# Altium PCB PCB1.PcbDoc
Units mm, origin at the board's own origin, x right, y up, seen from the top; angles counter-clockwise.
Board outline 81.92 x 91.69 mm, 2 copper layers (Top Layer, Bottom Layer); 42 components, 45 nets, 160 pads, 39 vias.
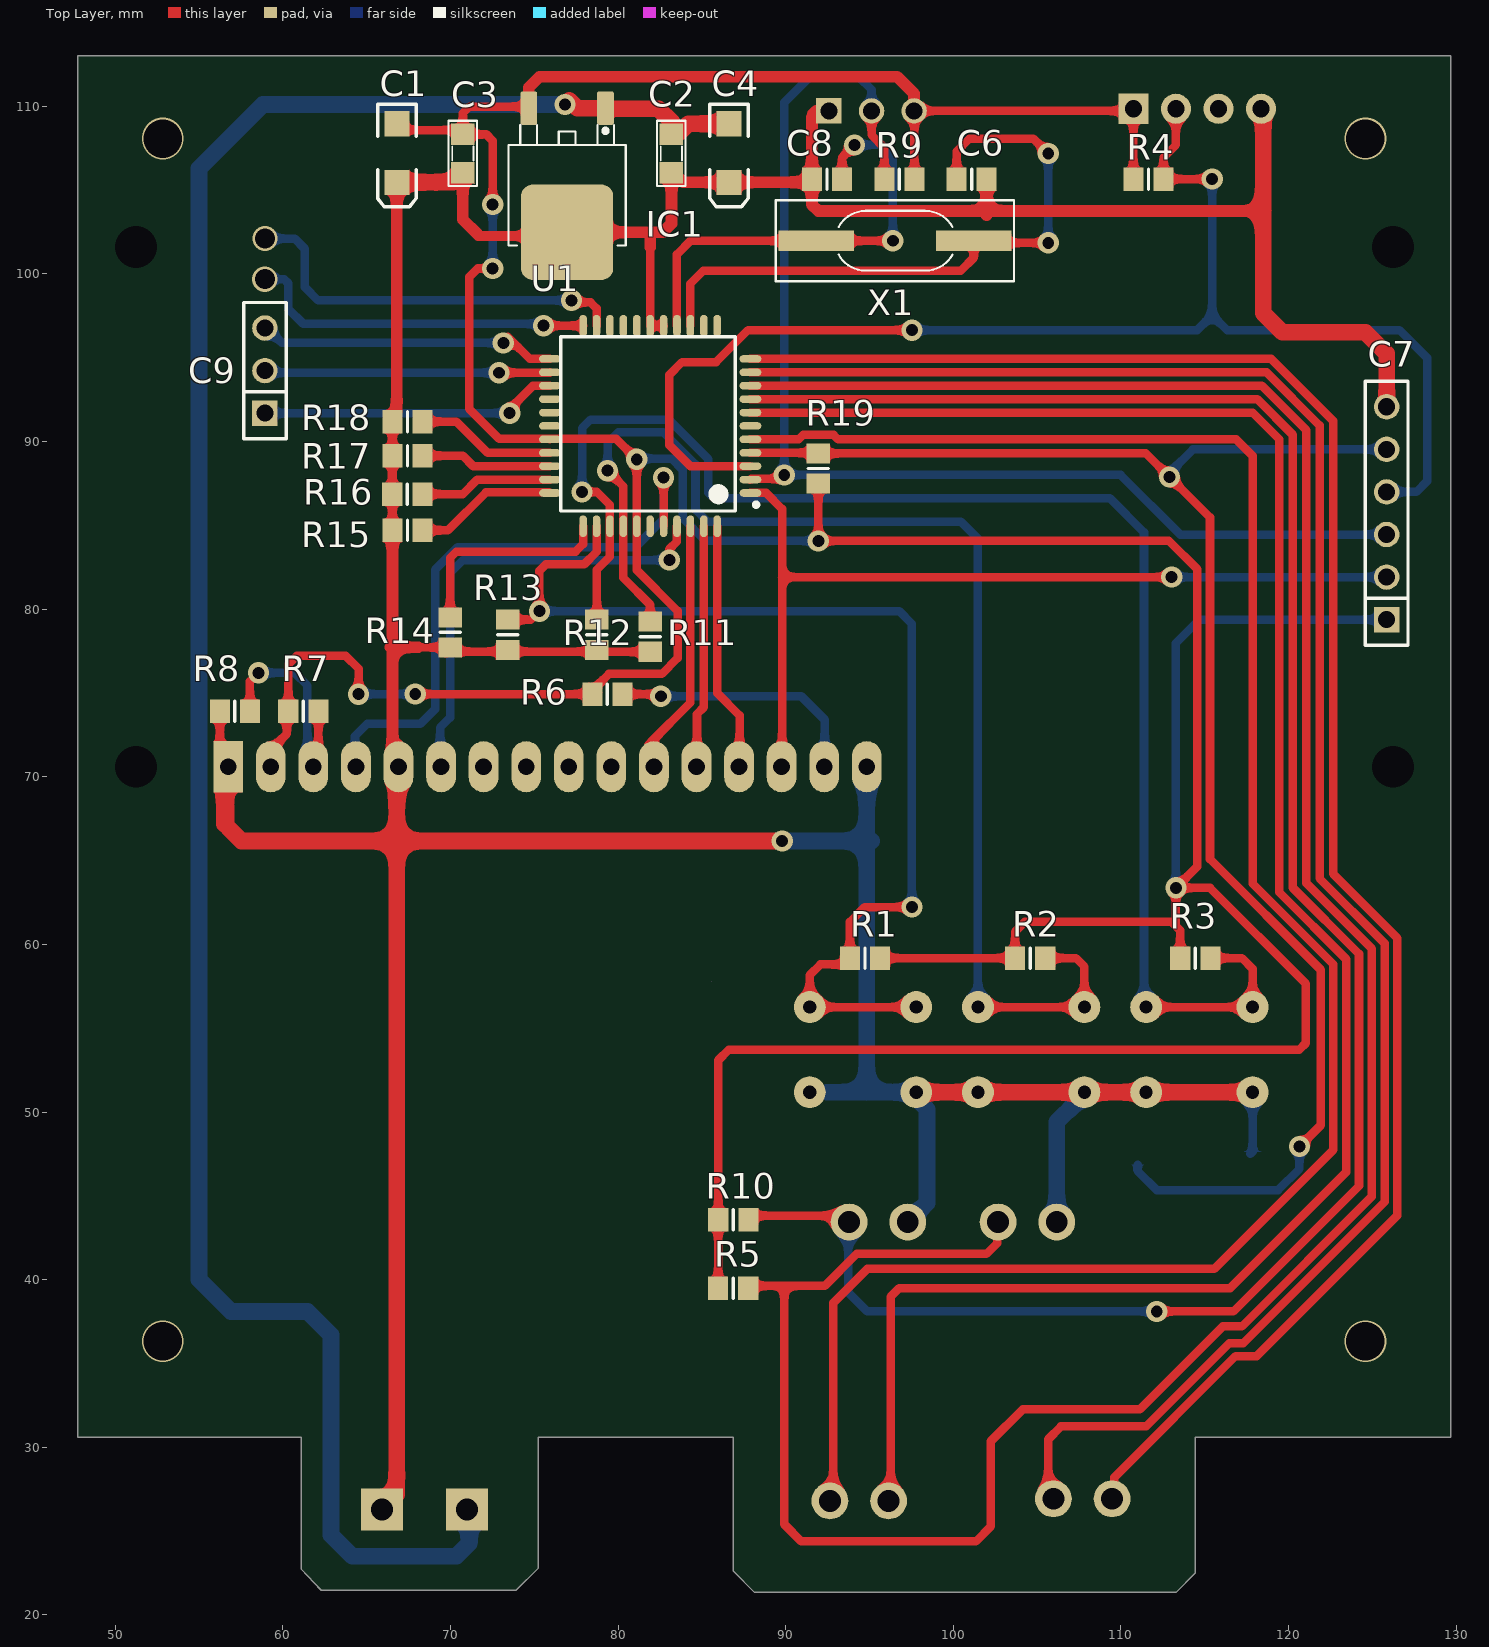
[diagram p0: Top Layer view]
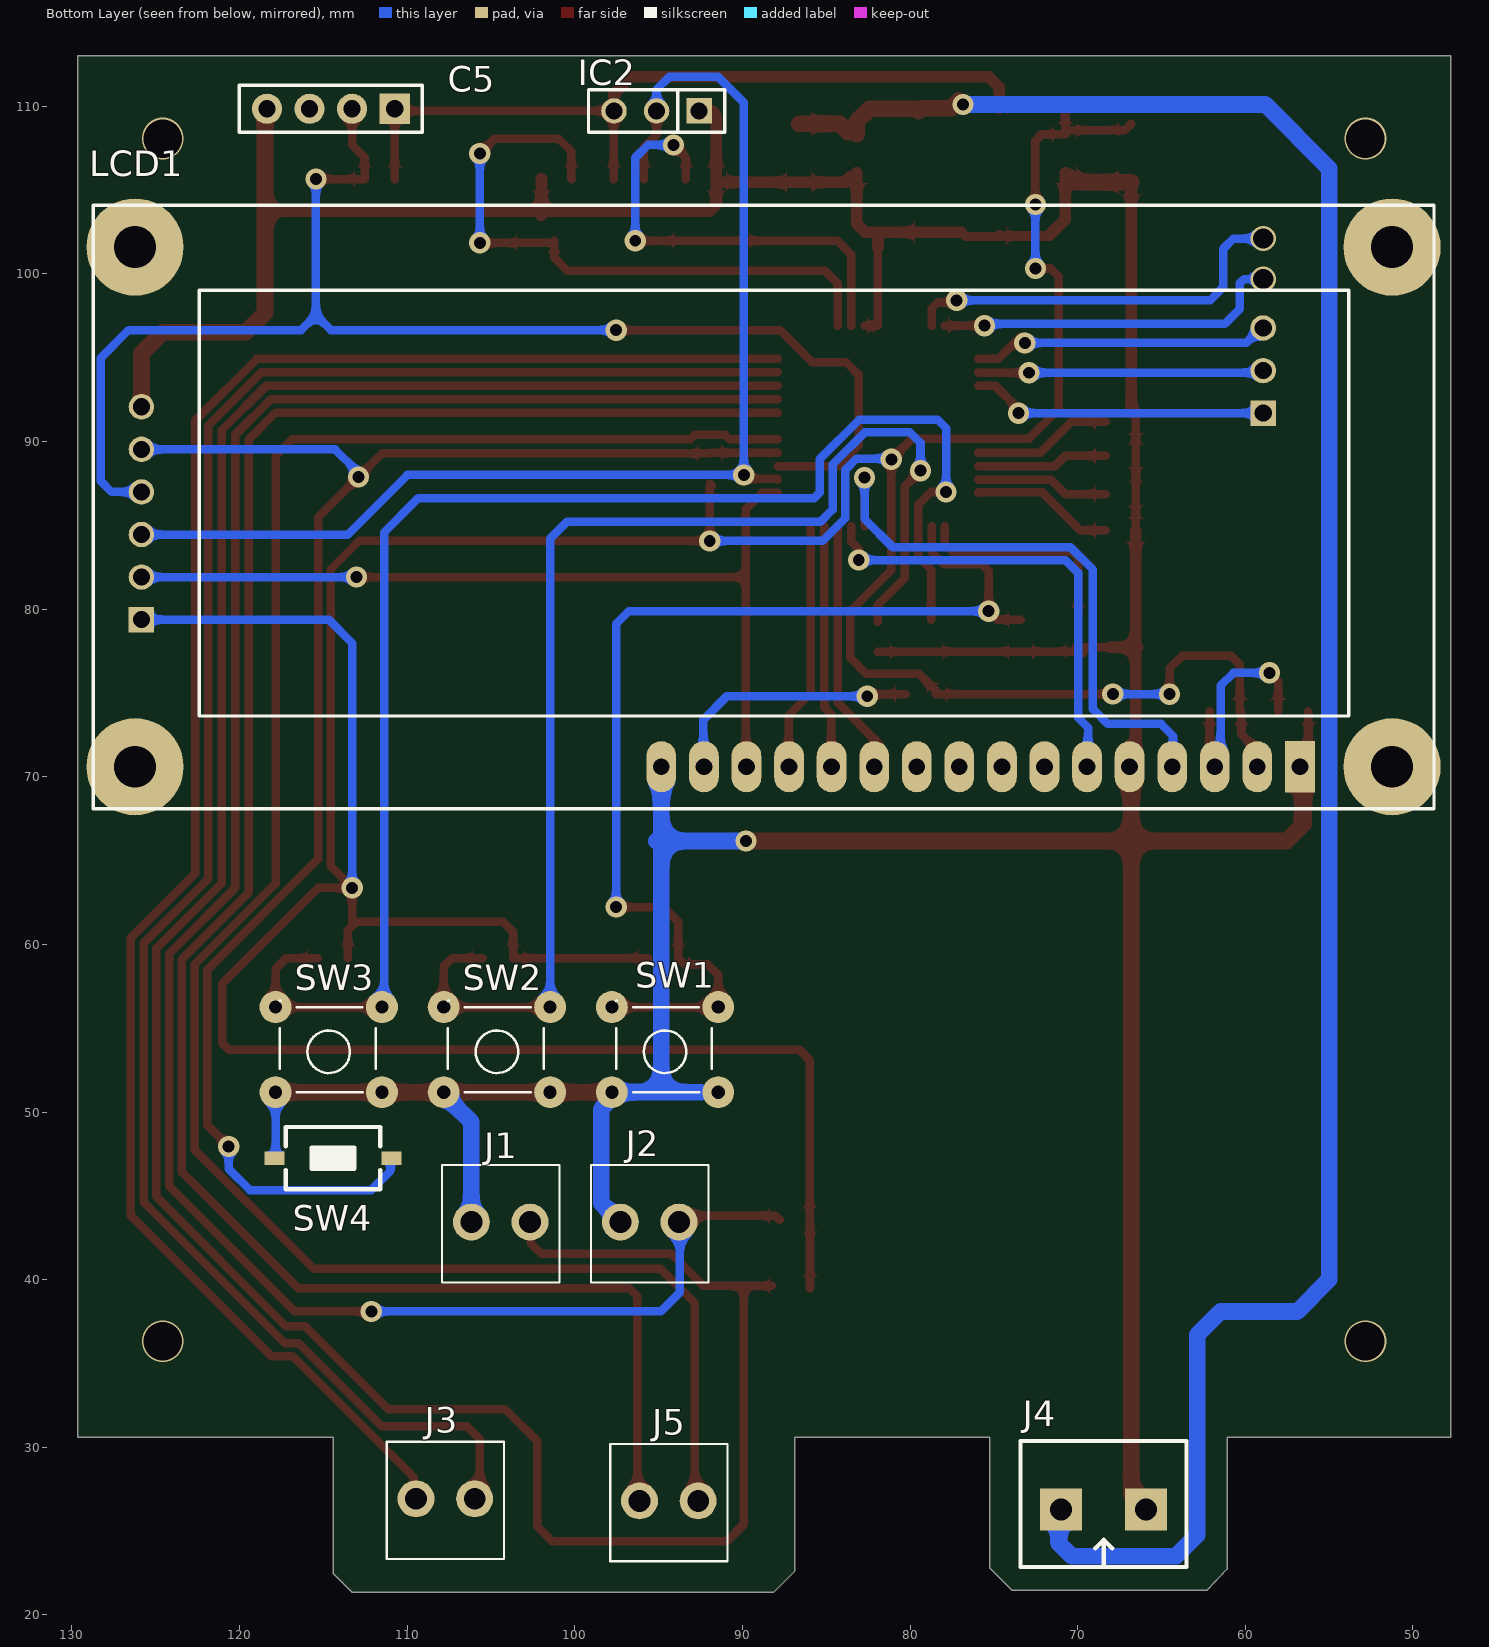
[diagram p1: Bottom Layer view, seen from below]
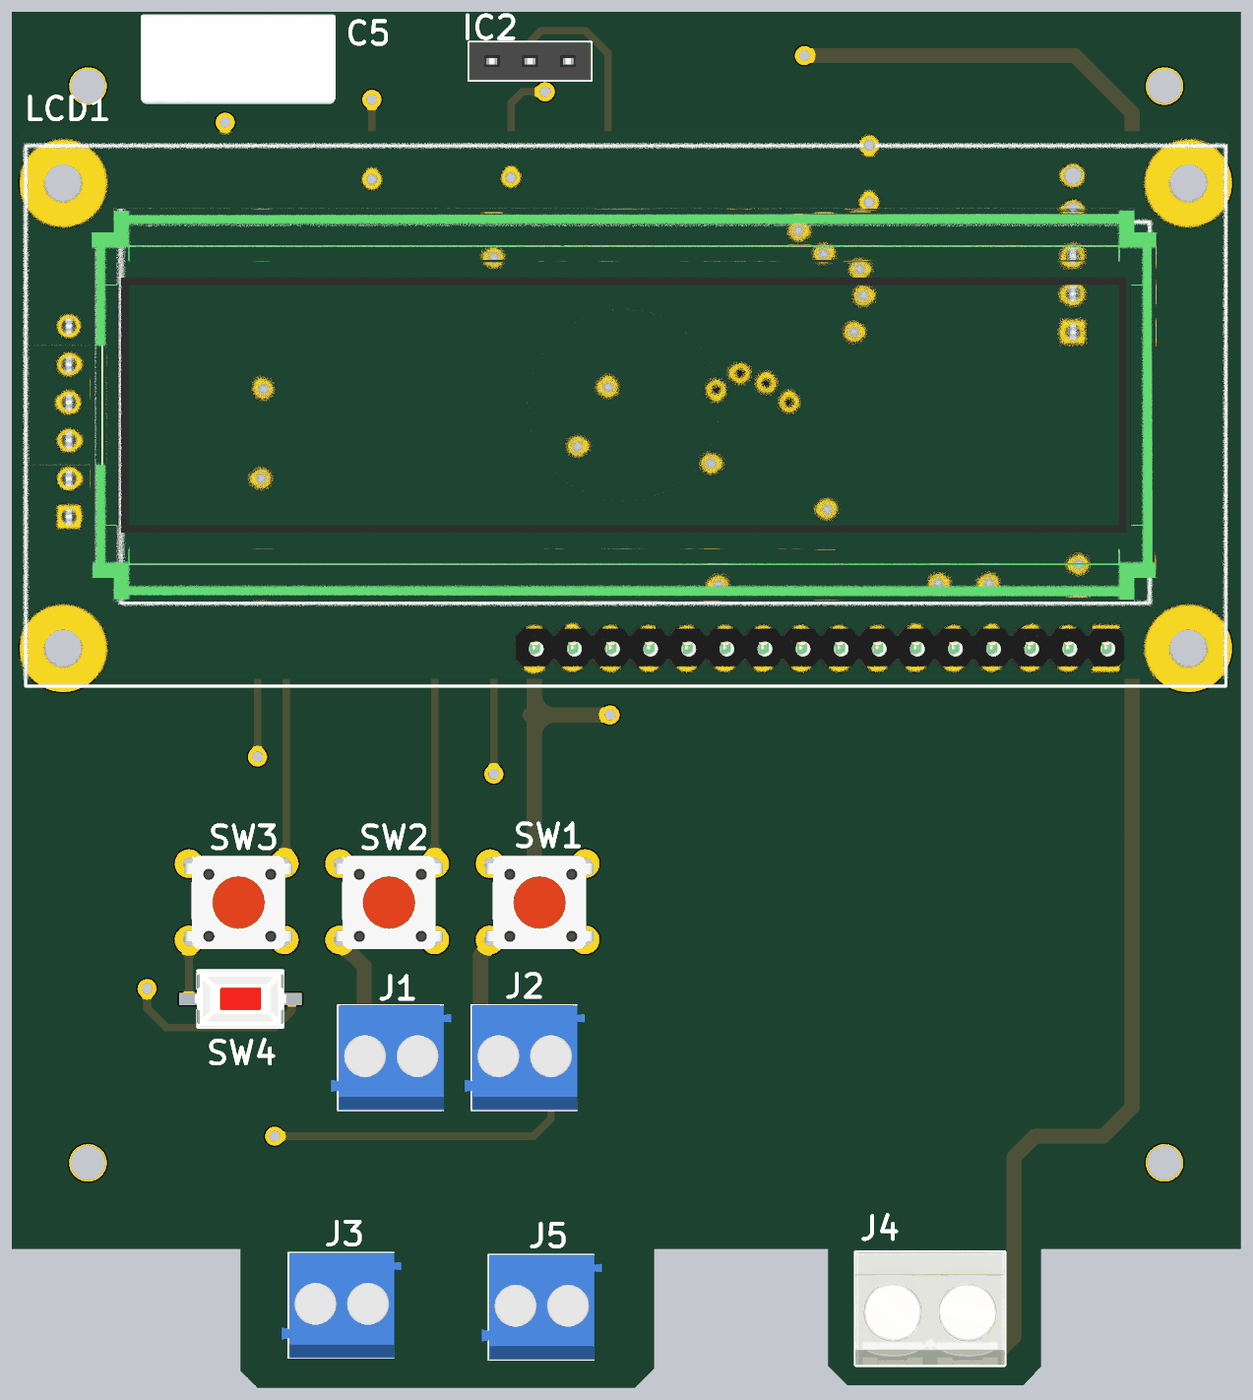
[diagram p2: 3D render of the assembled board from below, using the file's embedded part models]

## Layer stack, top to bottom
Top Solder: solder mask 0.0102, Solder Resist, Dk 3.5
Top Layer: signal copper 0.0356
Dielectric 1: dielectric 0.32, FR-4, Dk 4.8
Bottom Layer: signal copper 0.0356
Bottom Solder: solder mask 0.0102, Solder Resist, Dk 3.5

## Board outline
61.087,22.726 62.287,21.463 73.914,21.463 75.248,22.796 75.248,30.607 86.868,30.607 86.868,22.606 88.138,21.336 113.284,21.336 114.427,22.479 114.427,30.607 129.667,30.607 129.667,113.03 47.752,113.03 47.752,101.727 47.752,30.607 61.087,30.607
cut-out: 85.598,57.785

## Design rules (kind name [scope] priority, off if disabled: settings)
Clearance [All] p1: gap=0.254 ignorepadtopadclearanceinfootprint=FALSE
PlaneConnect [All] p1: planeconnectstyle=Direct reliefexpansion=0.508 reliefentries=4 reliefconductorwidth=0.254 reliefairgap=0.254
PolygonConnect [All] p1: connectstyle=Relief reliefconductorwidth=0.5 reliefentries=4 polygonreliefangle="90 Angle" airgapwidth=0.5
RoutingVias [All] p1: holewidth=0.711 width=1.27 viastyle="Through Hole" minholewidth=0.711 minwidth=1.27 maxholewidth=0.711 maxwidth=1.27
SolderMaskExpansion [All] p1: expansion=0.102
UnRoutedNet [All] p1: checkbadconnections=TRUE
Width [All] p1: maxlimit=2 minlimit=0.508 preferedwidth=0.508
28 further rules are at their usual default settings.

## Classes and differential pairs
component class sheet_LAC: C1 C2 C3 C4 C5 C6 C7 C8 C9 IC1 IC2 J4 J5 LCD1 R1 R2 R3 R4 R5 R6 R7 R8 R9 R10 R11 R12 R13 R14 R15 R16 R17 R18 R19 SW1 SW2 SW3 SW4 X1

## Components (designator, comment, footprint, x,y, rotation, side; value= is the part's Value field where it differs from the comment)
C1 "CN-ALU-SMD" 3.2X1.6X1.1 66.802,107.216 r270 top
C2 "104" SM-CAP-0805 83.185,108.331 r270 top value=0,1uF/300V
C3 "104" SM-CAP-0805 70.739,108.331 r270 top value=0,1uF/300V
C4 "CN-ALU-SMD" 3.2X1.6X1.1 86.614,107.216 r270 top
C5 "DHT11" DHT11 114.554,109.855 r0 bottom
C6 "33pF" 6-0805_N 101.092,105.664 r180 top value=100pF
C7 "JP6" JP6-C1T 125.857,79.375 r90 top
C8 "33pF" 6-0805_N 92.467,105.664 r0 top value=100pF
C9 "JP3" JP3-C1T 58.928,91.694 r90 top
IC1 "LM78xx" TO252-123 76.962,106.189 r180 top
IC2 "DS18S20" JP3-C1T 92.583,109.728 r0 bottom
J1 "KF2" KF2-3.5 104.422,43.434 r180 bottom
J2 "KF2" KF2-3.5 95.532,43.434 r180 bottom
J3 "KF2" KF2-3.5 107.724,26.924 r180 bottom
J4 "KF2" KF2-5.08 68.453,26.289 r0 bottom
J5 "KF2" KF2-3.5 94.389,26.797 r180 bottom
LCD1 "LCD16x2A" LCD16X2 56.738,70.6 r0 bottom locked
R1 "10k" 6-0805_N 94.731,59.182 r180 top value="R1/4W - 1K"
R2 "10k" 6-0805_N 104.584,59.182 r0 top value="R1/4W - 1K"
R3 "10k" 6-0805_N 114.438,59.182 r0 top value="R1/4W - 1K"
R4 "1k" 6-0805_N 111.644,105.664 r0 top value="R1/4W - 1K"
R5 "10k" 6-0805_N 86.868,39.497 r0 top value="R1/4W - 1K"
R6 "1k" 6-0805_N 79.364,74.93 r0 top value="R1/4W - 1K"
R7 "10k" 6-0805_N 61.225,73.914 r0 top value="R1/4W - 1K"
R8 "10k" 6-0805_N 57.139,73.914 r180 top value="R1/4W - 1K"
R9 "1k" 6-0805_N 96.785,105.664 r0 top value="R1/4W - 1K"
R10 "10k" 6-0805_N 86.879,43.561 r0 top value="R1/4W - 1K"
R11 "1k" 6-0805_N 81.915,78.359 r270 top value="R1/4W - 1K"
R12 "1k" 6-0805_N 78.74,78.475 r270 top value="R1/4W - 1K"
R13 "1k" 6-0805_N 73.406,78.475 r270 top value="R1/4W - 1K"
R14 "1k" 6-0805_N 69.977,78.613 r270 top value="R1/4W - 1K"
R15 "1k" 6-0805_N 67.437,84.709 r180 top value="R1/4W - 1K"
R16 "1k" 6-0805_N 67.426,86.868 r180 top value="R1/4W - 1K"
R17 "1k" 6-0805_N 67.437,89.154 r180 top value="R1/4W - 1K"
R18 "1k" 6-0805_N 67.437,91.186 r180 top value="R1/4W - 1K"
R19 "1k" 6-0805_N 91.948,88.392 r270 top value="R1/4W - 1K"
SW1 "SW" SW2-DIP 91.44,51.181 r0 bottom locked value="Button chip 4 pin"
SW2 "SW" SW2-DIP 101.473,51.181 r0 bottom locked value="Button chip 4 pin"
SW3 "SW" SW2-DIP 111.506,51.181 r0 bottom locked value="Button chip 4 pin"
SW4 "SW" SW1-SMD 114.427,47.244 r180 bottom value="SW chip 2 pin"
U1 "AT89S52-24AU" TQFP44 81.915,90.932 r180 top locked
X1 "12Mhz" XT2-SMD 96.393,101.981 r180 top value=4Mhz

## Footprints (in the part's own frame and the unit in brackets; to place one, negate y for a bottom-side part, rotate by r counter-clockwise, add the part's x,y. Pads: shape width x height; smd on the part's side, far side on the other; paste and mask are expansions set on the pad)
3.2X1.6X1.1 [mm] "SMT LED; 2 Flat Leads"
  rect 1.5x1.5 smd: 1(-1.75,0) 2(1.75,0)
  silkscreen extent -2.9,-1.15 3.2,1.15
6-0805_N [mm] "Chip Resistor, Body 2.0x1.2mm, IPC Medium Density"
  rect 1.2x1.4 smd: 1(-0.9,0) 2(0.9,0)
  silkscreen extent 0,-0.6 0,0.6, body extent -1.07,-0.7 1.07,0.7, height 0.7
DHT11 [mm]
  rect 1.8x1.8 hole 1.02: 1(-3.81,0)
  round 1.8 hole 1.02: 2(-1.27,0) 3(1.27,0) 4(3.81,0)
  silkscreen extent -5.46,-1.4 5.46,1.4, body extent -6.48,-3 6.52,3, height 26
JP3-C1T [mm] "3 row, straight, gold plating"
  rect 1.52x1.52 hole 1.02: 1(0,0)
  round 1.52 hole 1.02: 2(2.54,0) 3(5.08,0)
  silkscreen extent -1.52,-1.27 6.6,1.27, body extent -1.52,-1.25 6.6,1.25, height 8.51
JP6-C1T [mm] "6 row, straight, gold plating"
  rect 1.52x1.52 hole 1.02: 1(0,0)
  round 1.52 hole 1.02: 2(2.54,0) 3(5.08,0) 4(7.62,0) 5(10.16,0) 6(12.7,0)
  silkscreen extent -1.52,-1.27 14.22,1.27, body extent -1.52,-1.25 14.22,1.25, height 8.51
KF2-3.5 [mm] "3,50mm - modular - blue - Horizontal wire entry - Pressure clamp - 8,4mm height - 02p"
  round 2.2 hole 1.3: 1(-1.75,0) 2(1.75,0)
  silkscreen extent -3.5,-3.6 3.5,3.4, body extent -3.95,-3.6 4.05,3.4, height 8.41
KF2-5.08 [mm]
  rect 2.5x2.5 hole 1.3: 1(-2.54,0) 2(2.54,0)
  silkscreen extent -4.95,-4.08 4.95,3.43, body extent -5,-4.07 5,3.43, height 10
LCD16X2 [mil] "LCD dipslay 16x2, 16 pin"
  rect 70x120 hole 39.37: 1(0,0)
  oval 70x120 hole 39.37: 2(100,0.02) 3(200,0) 4(300,0) 5(400,0) 6(500,0) 7(600,0) 8(700,0) 9(800,0) 10(900,0) 11(1000,0) 12(1100,0) 13(1200,0) 14(1300,0) 15(1400,0) 16(1500,0)
  round 228.35 / inner round 0 / far side round 0 hole 98.43 unplated: M1(-216.54,0) M2(2736.22,0) M3(-216.54,-1220.47) M4(2736.22,-1220.47)
  silkscreen extent -315,-1319 2835,98, body extent -320,-1357 2849,80, height 714
SM-CAP-0805 [mil]
  rect 50x55 smd: 1(0,0) 2(90,0)
  silkscreen extent -32,-34 121,33, body extent 6,-25 84,25, height 31
SW1-SMD [mm]
  rect 1.2x0.8 smd: 1(-3.5,0) 2(3.5,0)
  silkscreen extent -2.82,-1.85 2.82,1.85, body extent -3.05,-1.85 3.05,1.85, height 2.5
SW2-DIP [mil] "SW button 4pin, 250 x250 mil"
  round 75 hole 31: 1(0,0) 2(0,-200) 3(250,-200) 4(250,0)
  silkscreen extent 15,-215 240,0, body extent -36,-220 276,24, height 276
TO252-123 [mm]
  round 0.5 on Mech15: 0(0,0)
  rrect25% 1x2 smd: 1(-2.285,-3.7) 3(2.285,-3.7)
  rrect25% 5.5x5.7 smd: 2(0,3.7)
  silkscreen extent -3.5,-2.7 3.5,4.5, body extent -3.3,-3.95 3.3,5.76, height 2.31
TQFP44 [mm] "TQFP, 44-Leads, Body 10X10mm, Pitch 0.80mm, IPC High Density"
  oval 1.3x0.45 smd: 1(-5.981,4) 2(-5.981,3.2) 3(-5.981,2.4) 4(-5.981,1.6) 5(-5.981,0.8) 6(-5.981,0) 7(-5.981,-0.8) 8(-5.981,-1.6) 9(-5.981,-2.4) 10(-5.981,-3.2) 11(-5.981,-4) 23(5.981,-4) 24(5.981,-3.2) 25(5.981,-2.4) 26(5.981,-1.6) 27(5.981,-0.8) 28(5.981,0) 29(5.981,0.8) 30(5.981,1.6) 31(5.981,2.4) 32(5.981,3.2) 33(5.981,4)
  oval 0.45x1.3 smd: 12(-4,-5.981) 13(-3.2,-5.981) 14(-2.4,-5.981) 15(-1.6,-5.981) 16(-0.8,-5.981) 17(0,-5.981) 18(0.8,-5.981) 19(1.6,-5.981) 20(2.4,-5.981) 21(3.2,-5.981) 22(4,-5.981) 34(4,5.981) 35(3.2,5.981) 36(2.4,5.981) 37(1.6,5.981) 38(0.8,5.981) 39(0,5.981) 40(-0.8,5.981) 41(-1.6,5.981) 42(-2.4,5.981) 43(-3.2,5.981) 44(-4,5.981)
  silkscreen extent -6.45,-5.33 5.33,5.07, body extent -5.99,-5.96 6.01,6.04, height 1.05
XT2-SMD [mm]
  rect 4.5x1.2 smd: 1(-4.826,0) 2(4.572,0)
  silkscreen extent -7.24,-2.41 6.99,2.41, body extent -6.53,-2.41 6.27,2.42, height 4.3

## Part data
C1 C4: "Polarized Capacitor (Axial)", LatestRevisionDate=17-Jul-2002, LatestRevisionNote="Re-released for DXP Platform.", PackageReference=POLAR0.8, Published=8-Jun-2000, Publisher="Altium Limited"
C2 C3: library part CN, Designed by=VanDungEvn
C5: Manufacturer="Würth Elektronik eiSos GmbH", partNo=613004143121, ComponentLink1 Description=Manufacturer, ComponentLink1URL=http://www.we-online.com, ComponentLink2 Description=Datasheet, ComponentLink2URL=http://katalog.we-online.de/em/datasheet/6130xx143121.pdf, Created by="Karrer Zheng", Created Date="29 March 2013", NoPins=04
C6 C8: library part CN1, "Cap np  1pF - 472pF"
C7: "WR-PHD 2.54 mm Angled Socket Header", Manufacturer="Würth Elektronik eiSos GmbH", partNo=613006143121, ComponentLink1 Description=Manufacturer, ComponentLink1URL=http://www.we-online.com, ComponentLink2 Description=Datasheet, ComponentLink2URL=http://katalog.we-online.de/em/datasheet/6130xx143121.pdf, Created by="Karrer Zheng", Created Date="29 March 2013", NoPins=06
C9: "WR-PHD 2.54 mm Angled Socket Header", Manufacturer="Würth Elektronik eiSos GmbH", partNo=613003143121, ComponentLink1 Description=Manufacturer, ComponentLink1URL=http://www.we-online.com, ComponentLink2 Description=Datasheet, ComponentLink2URL=http://katalog.we-online.de/em/datasheet/6130xx143121.pdf, Created by="Karrer Zheng", Created Date="29 March 2013", NoPins=03
IC1: "Positive Voltage Regulator", ComponentLink1Description="Manufacturer Link", ComponentLink1URL=http://www.st.com/, ComponentLink2Description=Datasheet, ComponentLink2URL=http://www.st.com/stonline/products/literature/ds/2146/l78m05c.pdf, DatasheetVersion=Apr-1994, LatestRevisionDate=17-Jul-2002, LatestRevisionNote="Re-released for DXP Platform.", Note="Tab is connected to pin 3 (GND).", PackageDescription="TO, Thru-Hole, Vertical, Heatsink Mounted; 3 In-Line Leads; Pitch 2.54 mm; Pin sequence 1, 3, 2", PackageReference=ISOWATT220AB, PackageVersion=Jul-1998, Published=24-Aug-2001, Publisher="Altium Limited"
IC2: "High Precision  1-Wire® Digital Thermometer"
J1 J2 J3 J4 J5: Manufacturer="Würth Elektronik eiSos GmbH", partNo=691103110002, ComponentLink1 Description=Manufacturer, ComponentLink1URL=http://www.we-online.com, ComponentLink2 Description=Datasheet, ComponentLink2URL=http://katalog.we-online.de/em/datasheet/6911031100xx.pdf, Created by="Karrer Zheng", Created Date="29 October 2013", NoPins=2
LCD1: library part LCD16x2, "LCD dipslay 16 char, 2 line"
R1 R2 R3 R4 R5 R6 R7 R8 R9 R10 R11 R12 R13 R14 R15 R16 R17 R18 R19: library part R1/4W, "Resistor 1/4W"
SW1 SW2 SW3: library part SW4, "Switch button 4 pin"
SW4: library part SW2, "Switch button 2 pin"
U1: "Atmel 8 Bit Micro 4.0-5.5V 24MHz -40 to +80 Deg C 44TQFP (44A) Package GREEN OPTION", Package="44A 44-lead, Thin Plastic Gull Wing Quad Flatpack (TQFP)", GREEN OPTION=YES, PartNr=AT89S52-24AU, Vendor=ATMEL
X1: library part XT2, "Crystal, 32.768 KHz, -40 to 85 degC, 3.2 x 1.5 x 0.9 mm SMD"

## Via types
v1: diameter 1.27, hole 0.711, Top Layer to Bottom Layer, 33 vias
v2: diameter 2.5, hole 2.3, Top Layer to Bottom Layer, 4 vias
v3: diameter 1.52, hole 1.2, Top Layer to Bottom Layer, 1 vias
v4: diameter 1.5, hole 1.2, Top Layer to Bottom Layer, 1 vias

## Nets (pads, with @x,y where several pads share a name; then routed paths per layer and width w, separated by ;. In a path a pad name is that pad's centre, name@x,y a point inside that pad or via, vN(x,y) a via of type N, cw(c..) or ccw(c..) an arc to the next point about the centre after c; other vN are vias at no path point)
06: U1.6
12: U1.12
13: U1.13
18: U1.18
19: U1.19
20: U1.20
21: U1.21 | length 23.3
  Top Layer w0.508: v1@77.724,98.298 78.359,98.298 78.715,97.942 U1.21
  Bottom Layer w0.508: v4(58.928,102.108) 60.706,102.108 61.309,101.505 61.309,99.219 62.103,98.425 v1(77.216,98.425)
22: U1.22 | length 20.6
  Top Layer w0.508: v1(75.553,96.913) U1.22
  Bottom Layer w0.508: v3@59.563,99.822 59.69,99.695 60.071,99.695 60.325,99.441 60.325,97.917 61.214,97.028 75.438,97.028 v1(75.553,96.913)
  Bottom Layer w0.51: v3@59.436,99.568 v3@59.563,99.568
  other v3: 58.928,99.695
23: C9.3 U1.23 | length 17.9
  Top Layer w0.508: v1(73.152,95.885) 73.152,96.012 73.406,96.266 74.74,94.932 U1.23
  Bottom Layer w0.508: C9.3@59.182,96.647 59.944,95.885 v1(73.152,95.885)
24: C9.2 U1.24 | length 17.1
  Top Layer w0.508: v1(72.898,94.107) 75.909,94.107 U1.24
  Bottom Layer w0.508: C9.2 59.055,94.107 v1(72.898,94.107)
25: C9.1 U1.25 | length 17.8
  Top Layer w0.508: v1(73.533,91.694) 73.533,91.948 74.917,93.332 U1.25
  Bottom Layer w0.508: C9.1 v1(73.533,91.694)
26: U1.26
27: U1.27
28: U1.28
29: U1.39
30: R18.1 U1.30 | length 8.4
  Top Layer w0.508: R18.1 70.358,91.186 72.212,89.332 U1.30
31: R17.1 U1.31 | length 7.9
  Top Layer w0.508: R17.1 70.739,89.154 71.361,88.532 U1.31
32: R16.1 U1.32 | length 8
  Top Layer w0.508: R16.1 70.739,86.868 71.603,87.732 U1.32
33: R15.1 U1.33 | length 8.5
  Top Layer w0.508: R15.1 69.85,84.709 72.111,86.97 75.896,86.97 U1.33
34: R14.1 U1.34 | length 12.9
  Top Layer w0.508: R14.1 69.977,83.058 70.358,83.439 77.47,83.439 77.915,83.884 U1.34
+12: C2.1 C4.1 IC1.1 J4.2 | length 134.4
  Top Layer w0.508: IC1.1 82.423,109.889
  Top Layer w1: v1@77.089,110.363 77.563,109.889 IC1.1 ; IC1.1@79.502,109.728 79.629,109.855 82.423,109.855 83.185,109.093 C2.1 ; C2.1@83.693,108.458 84.201,108.966 C4.1
  Bottom Layer w1: J4.2@71.12,25.146 71.12,24.257 70.358,23.495 64.135,23.495 62.865,24.765 62.865,36.703 61.468,38.1 56.896,38.1 54.991,40.005 54.991,106.299 58.801,110.109 v1(76.835,110.109)
channel: R1.2 R13.1 SW1.2 SW1.3 U1.35 | length 66
  Top Layer w0.508: R13.1 74.803,79.375 v1(75.311,79.883) 75.311,82.296 75.692,82.677 77.978,82.677 78.715,83.414 U1.35 ; SW1.3@97.155,56.261 SW1.2 91.44,58.166 92.075,58.801 93.45,58.801 R1.2 93.831,61.341 94.72,62.23 v1(97.536,62.23)
  Bottom Layer w0.508: v1(75.311,79.883) 96.774,79.883 97.536,79.121 v1(97.536,62.23)
Control_H: J5.1 U1.7 | length 119.1
  Top Layer w0.508: U1.7 117.856,91.732 119.456,90.132 119.456,63.105 123.444,59.117 123.444,46.42 116.521,39.497 96.774,39.497 96.266,38.989 J5.1@96.266,27.686
Control_T: J5.2 U1.5 | length 118.6
  Top Layer w0.508: U1.5 90.77,90.132 91.038,90.4 92.858,90.4 93.126,90.132 116.878,90.132 117.856,89.154 117.856,63.627 122.682,58.801 122.682,47.752 115.57,40.64 94.869,40.64 92.837,38.608 92.837,27.813 J5.2@92.964,27.686
DATA_RH: C5.2 C7.4 R4.2 U1.3 | length 81.8
  Top Layer w0.508: U1.3 84.315,88.532 83.058,89.789 83.058,93.98 83.82,94.742 85.852,94.742 87.757,96.647 v1@96.901,96.647 ; C5.2 113.284,107.696 112.544,106.956 R4.2 v1(115.443,105.664)
  Bottom Layer w0.508: v1@97.917,96.647 114.554,96.647 115.443,97.536 ; v1(115.443,105.664) 115.443,97.536 ; C7.4 127.635,86.995 128.27,87.63 128.27,94.996 126.619,96.647 116.332,96.647 115.443,97.536
  other v1: 97.536,96.647
DQ: C7.3 IC2.2 R9.1 U1.2 | length 73.4
  Top Layer w0.508: U1.2 87.934,87.77 89.802,87.77 89.916,87.884 v1(89.916,88.011) ; IC2.2@95.123,109.474 95.123,108.296 95.885,107.534 R9.1
  Bottom Layer w0.508: IC2.2 95.123,110.998 94.361,111.76 91.44,111.76 89.916,110.236 v1(89.916,88.011) 109.982,88.011 113.538,84.455 C7.3
Engine1: J3.1 U1.11 | length 109.4
  Top Layer w0.508: U1.11 118.967,94.932 122.656,91.243 122.656,64.215 126.492,60.379 126.492,43.815 118.11,35.433 116.84,35.433 109.601,28.194 J3.1@109.601,27.432
Engine2: J3.2 U1.10 | length 111.7
  Top Layer w0.508: U1.10 118.689,94.132 121.856,90.965 121.856,63.938 125.73,60.064 125.73,44.639 117.286,36.195 116.459,36.195 111.506,31.242 106.426,31.242 105.664,30.48 J3.2@105.664,27.94
Giam: R3.2 R12.1 SW3.2 SW3.3 U1.36 | length 90.4
  Top Layer w0.508: v1(77.851,86.995) 78.74,86.995 79.515,86.22 U1.36 79.515,83.136 78.74,82.361 R12.1 ; SW3.2 SW3.3 117.856,58.547 117.221,59.182 R3.2
  Bottom Layer w0.508: v1(77.851,86.995) 77.851,90.805 78.359,91.313 83.02,91.313 85.382,88.951 85.382,86.957 85.725,86.614 109.347,86.614 111.379,84.582 111.379,56.388 SW3.2
GND: C1.2 C2.2 C3.2 C4.2 C5.4 C6.1 C7.6 C8.1 IC1.2 IC2.1 J1.1 J2.1 J4.1 LCD1.1 LCD1.5 LCD1.16 R8.2 R11.2 R12.2 R13.2 R14.2 R15.2 R16.2 R17.2 R18.2 SW1.1 SW1.4 SW2.1 SW2.4 SW3.1 SW3.4 SW4.1 U1.16 U1.17 | length 308.4
  Top Layer w0.508: R8.2 56.239,70.915 LCD1.1@56.554,70.6 ; R15.2 66.537,86.857 R16.2 66.526,89.143 R17.2 R18.2 R18.2@66.537,91.567 ; R18.2@66.548,91.567 R18.2@66.675,91.694 ; LCD1.5@66.816,70.499 LCD1.5@66.929,70.385 ; LCD1.5@66.898,70.581 LCD1.5 ; LCD1.5@66.929,70.815 LCD1.5@66.929,72.009 ; 68.072,77.724 R14.2@69.966,77.724 ; R14.2@69.734,77.47 73.406,77.47 79.576,77.47 79.587,77.459 R11.2 ; C3.2@70.485,105.791 C3.2 ; IC1.2@74.676,102.362 74.612,102.298 71.564,102.298 71.628,102.235 76.708,102.235 IC1.2 ; 81.915,101.6 U1.17 U1.16 ; C2.2 83.439,105.791 C2.2@83.566,105.791 ; 91.821,109.728 IC2.1 ; LCD1.16@94.361,70.612 LCD1.16@94.742,70.231 ; LCD1.16@94.654,70.6 LCD1.16@94.869,70.815 ; SW1.4 SW1.4@98.044,51.181 ; SW2.1 SW2.1@101.6,51.181 ; C6.1@101.981,105.653 C6.1
  Top Layer w0.7: 56.515,67.183 56.738,66.96 LCD1.1 ; 66.421,77.724 66.537,77.724 ; R15.2 66.537,77.724 ; LCD1.5@66.548,72.009 66.537,72.02 66.537,77.724 ; R18.2@66.675,91.694 66.802,91.821 C1.2 ; 68.072,77.724 66.537,77.724 ; R14.2@69.734,77.47 R14.2 ; C3.2 70.739,103.251 71.628,102.362 ; IC1.2 82.677,102.489 83.185,102.997 C2.2 ; 81.915,101.6 81.915,102.235 ; C2.2@83.566,105.791 83.891,105.466 C4.2 91.496,105.466 C8.1@91.567,105.537 ; 91.63,109.537 91.821,109.728 ; 91.694,109.474 91.567,109.347 C8.1 C8.1@91.567,105.537 ; 101.981,103.505 101.992,103.516 101.992,103.759 ; C6.1 101.992,103.759 ; 118.491,103.759 101.992,103.759 ; C8.1@91.567,105.537 91.567,104.14 91.948,103.759 101.992,103.759
  Top Layer w1: 56.515,67.183 56.515,69.596 LCD1.1@56.642,69.723 ; 56.738,66.96 57.531,66.167 66.802,66.167 ; J4.1 66.802,27.178 66.802,66.167 ; LCD1.5@66.802,69.088 66.802,66.167 ; C1.2 70.16,105.466 C3.2@70.485,105.791 ; v1(89.789,66.167) 66.802,66.167 ; SW1.4@98.044,51.181 SW2.1 ; SW2.1@101.6,51.181 SW2.4 SW3.1@111.252,51.181 ; SW3.1@111.887,51.181 SW3.4 ; C5.4 118.491,109.728 118.491,103.759 118.491,97.663 119.634,96.52 124.587,96.52 125.857,95.25 C7.6
  Bottom Layer w0.508: SW1.1 92.456,51.181 ; SW4.1@117.729,47.498 117.856,47.625 SW3.4
  Bottom Layer w1: v1(89.789,66.167) 94.838,66.167 ; 92.456,51.181 94.838,51.181 ; LCD1.16 94.838,66.167 ; 95.123,66.167 94.838,66.167 ; J2.1 98.425,44.577 98.425,50.165 SW1.4@97.917,50.673 ; SW1.4@97.409,51.181 94.838,51.181 ; J1.1 106.172,49.403 SW2.4@107.315,50.546 ; 94.838,51.181 94.838,66.167
LCD_D4: LCD1.11 U1.42 | length 15.3
  Top Layer w0.508: LCD1.11@81.954,70.6 81.954,72.062 84.315,74.423 U1.42
LCD_D5: LCD1.12 U1.43 | length 14.6
  Top Layer w0.508: LCD1.12@84.494,70.6 84.709,70.815 84.709,73.739 85.115,74.145 U1.43
LCD_D6: LCD1.13 U1.44 | length 15
  Top Layer w0.508: U1.44 85.915,74.994 87.249,73.66 87.249,70.815 LCD1.13@87.034,70.6
LCD_D7: C7.2 LCD1.14 U1.1 | length 53.7
  Top Layer w0.508: U1.1 88.836,86.932 89.789,85.979 89.789,81.915 ; LCD1.14@89.789,70.612 89.789,81.915 ; v1(113.03,81.915) 89.789,81.915
  Bottom Layer w0.508: v1(113.03,81.915) C7.2
LCD_EN: LCD1.6 U1.41 | length 27.4
  Top Layer w0.508: v1(83.058,82.931) 83.058,83.578 83.515,84.035 U1.41
  Bottom Layer w0.508: LCD1.6@69.381,70.6 69.381,72.937 69.977,73.533 69.977,82.169 70.739,82.931 v1(83.058,82.931)
LCD_RS: LCD1.4 U1.40 | length 35.8
  Top Layer w0.508: U1.40 v1(82.715,87.846)
  Bottom Layer w0.508: LCD1.4@64.301,70.6 64.301,72.429 65.024,73.152 68.199,73.152 69.088,74.041 69.088,82.358 70.423,83.693 81.026,83.693 82.715,85.382 v1(82.715,87.846)
NetLCD1_3: LCD1.3 R7.2 R8.1 | length 14.3
  Top Layer w0.508: R8.1 58.039,75.692 v1(58.547,76.2) ; LCD1.3@61.634,70.6 62.125,71.091 R7.2
  Bottom Layer w0.508: v1(58.547,76.2) 60.706,76.2 61.468,75.438 61.468,70.835 LCD1.3@61.818,70.485
NetLCD1_15: LCD1.15 R6.2 | length 15.7
  Top Layer w0.508: R6.2 82.423,74.93 v1(82.55,74.803)
  Bottom Layer w0.508: v1(82.55,74.803) 90.932,74.803 92.329,73.406 92.329,71.12 LCD1.15@91.821,70.612
quayPhai: J2.2 R10.2 U1.8 | length 122.5
  Top Layer w0.508: R10.2 88.033,43.815 93.091,43.815 J2.2@93.218,43.942 ; U1.8 118.134,92.532 120.256,90.41 120.256,63.382 124.206,59.432 124.206,45.593 116.713,38.1 v1(112.141,38.1)
  Bottom Layer w0.508: J2.2@93.726,42.418 93.726,39.243 94.869,38.1 v1(112.141,38.1)
quayTrai: J1.2 R5.2 U1.9 | length 158.5
  Top Layer w0.508: U1.9 118.411,93.332 121.056,90.687 121.056,63.66 124.968,59.748 124.968,44.954 117.225,37.211 116.078,37.211 111.125,32.258 104.14,32.258 102.235,30.353 102.235,25.273 101.346,24.384 90.932,24.384 89.916,25.4 89.916,39.624 ; R5.2@88.265,39.624 89.154,39.624 ; 89.281,39.624 89.916,39.624 ; J1.2@102.616,42.545 102.616,42.164 101.981,41.529 94.234,41.529 92.329,39.624 89.916,39.624
RESET: C7.5 R19.1 SW4.2 U1.4 | length 96.2
  Top Layer w0.508: U1.4 91.908,89.332 R19.1 111.495,89.292 v1(112.903,87.884) 115.316,85.471 115.316,65.089 121.92,58.485 121.92,49.207 v1(120.65,47.937)
  Bottom Layer w0.508: SW4.2@110.998,46.863 110.998,46.482 112.141,45.339 119.38,45.339 120.65,46.609 v1(120.65,47.937) ; v1@113.03,88.265 114.3,89.535 C7.5@125.349,89.535 ; C7.5@125.349,89.535 125.603,89.281 C7.5 C7.5@125.349,89.535
tang: R2.2 R11.1 SW2.2 SW2.3 U1.37 | length 77.5
  Top Layer w0.508: v1(79.375,88.265) 80.315,87.325 U1.37 80.315,81.864 81.915,80.264 R11.1 ; SW2.2 SW2.3 107.823,58.674 107.315,59.182 R2.2
  Bottom Layer w0.508: v1(79.375,88.265) 79.375,89.916 80.01,90.551 82.704,90.551 84.62,88.635 84.62,85.941 85.344,85.217 100.457,85.217 101.473,84.201 SW2.2
VCC: C1.1 C3.1 C5.1 C7.1 IC1.3 IC2.3 LCD1.2 R1.1 R2.1 R3.1 R4.1 R5.1 R6.1 R7.1 R9.2 R10.1 R19.2 U1.29 U1.38 | length 308.2
  Top Layer w0.508: LCD1.2@59.094,70.6 59.094,71.413 60.237,72.556 60.237,73.826 R7.1 60.325,76.708 60.833,77.216 63.754,77.216 64.516,76.454 v1(64.516,74.93) ; C1.1 67.183,108.585 70.485,108.585 C3.1 ; v1(67.897,74.936) 78.458,74.936 R6.1 78.464,75.148 79.454,76.138 82.612,76.138 83.553,77.079 83.553,79.896 81.115,82.334 U1.38 v1(81.115,88.938) 79.883,90.17 U1.29@75.946,90.17 ; v1(72.517,100.33) 71.628,100.33 71.12,99.822 71.12,91.948 72.898,90.17 75.896,90.17 U1.29 ; v1(72.517,104.14) 72.517,107.95 72.136,108.331 C3.1 ; IC1.3 74.584,109.982 71.12,109.982 70.739,109.601 C3.1 ; R5.1 85.968,43.423 R10.1@85.979,43.434 ; R10.1 85.979,53.086 86.614,53.721 120.65,53.721 121.031,54.102 121.031,57.658 115.316,63.373 v1(113.284,63.373) ; R19.2 91.821,87.365 91.948,87.238 v1(91.948,84.074) 112.868,84.074 114.554,82.388 114.554,64.643 v1(113.284,63.373) ; R1.1 R2.1 103.684,60.758 104.267,61.341 113.03,61.341 113.284,61.087 ; IC2.3@97.663,110.363 IC2.3 ; R9.2 97.685,109.706 IC2.3 ; R4.1 C5.1 110.617,109.728 IC2.3 ; R3.1 113.538,60.833 113.284,61.087 ; 113.284,61.087 v1(113.284,63.373)
  Top Layer w0.7: IC1.3 74.677,111.126 75.311,111.76 96.647,111.76 97.663,110.744 IC2.3@97.663,110.363
  Bottom Layer w0.508: v1(64.516,74.93) 64.522,74.936 v1(67.897,74.936) ; v1(72.517,100.33) v1(72.517,104.14) ; v1(81.115,88.938) 81.166,88.989 83.188,88.989 83.858,88.319 83.858,85.433 85.217,84.074 v1(91.948,84.074) ; v1(113.284,63.373) 113.284,77.978 114.681,79.375 C7.1
XTAL1: C6.2 U1.14 X1.1 | length 38.7
  Top Layer w0.508: U1.14 84.315,99.428 85.09,100.203 100.457,100.203 101.219,100.965 X1.1 101.346,101.854 v1(105.664,101.854) ; C6.2 100.203,105.675 100.203,107.315 100.965,108.077 104.775,108.077 v1(105.664,107.188)
  Bottom Layer w0.508: v1(105.664,101.854) v1(105.664,107.188)
XTAL2: C8.2 U1.15 X1.2 | length 27.4
  Top Layer w0.508: U1.15 83.515,101.168 84.328,101.981 X1.2 v1(96.393,101.981) ; C8.2 93.367,106.956 v1(94.107,107.696)
  Bottom Layer w0.508: v1(94.107,107.696) 95.631,107.696 96.393,106.934 v1(96.393,101.981)
pads on no net: C5.3 IC1.0 LCD1.7 LCD1.8 LCD1.9 LCD1.10 LCD1.M1 LCD1.M2 LCD1.M3 LCD1.M4
copper on no net:
  other v2: 52.832,36.322 124.587,36.322 52.832,108.077 124.587,108.077

## Polygon pours and split planes (outlines as drawn)
GND on Top Layer (solid, pour order 0): 47.879,112.776
GND on Bottom Layer (solid, pour order 8): 64.135,120.269
GND on Bottom Layer (solid, pour order 4): 91.059,61.722

## Silkscreen, mask and mechanical layers (free items; w line width, h text height)
Top Solder:
  lines w0: 54.991,99.06 127.381,99.06
Mechanical 1:
  lines w0.5: 47.752,101.727 47.752,101.727 ; 47.752,101.727 47.752,30.607 61.087,30.607 61.087,22.726 62.287,21.463 73.914,21.463 75.248,22.796 75.248,30.607 78.867,30.607 86.868,30.607 86.868,22.606 88.138,21.336 92.512,21.336 113.284,21.336 114.427,22.479 114.427,30.607 122.555,30.607 129.667,30.607 129.667,113.03 47.752,113.03 47.752,101.727